# Altium PCB usage_monitoring_unit.PcbDoc
Units mm, origin at the board's own origin, x right, y up, seen from the top; angles counter-clockwise.
Board outline 87.63 x 38.33 mm, 2 copper layers (Top Layer, Bottom Layer); 52 components, 37 nets, 215 pads, 53 vias.
Unrouted connection lines stored in the file: 3.
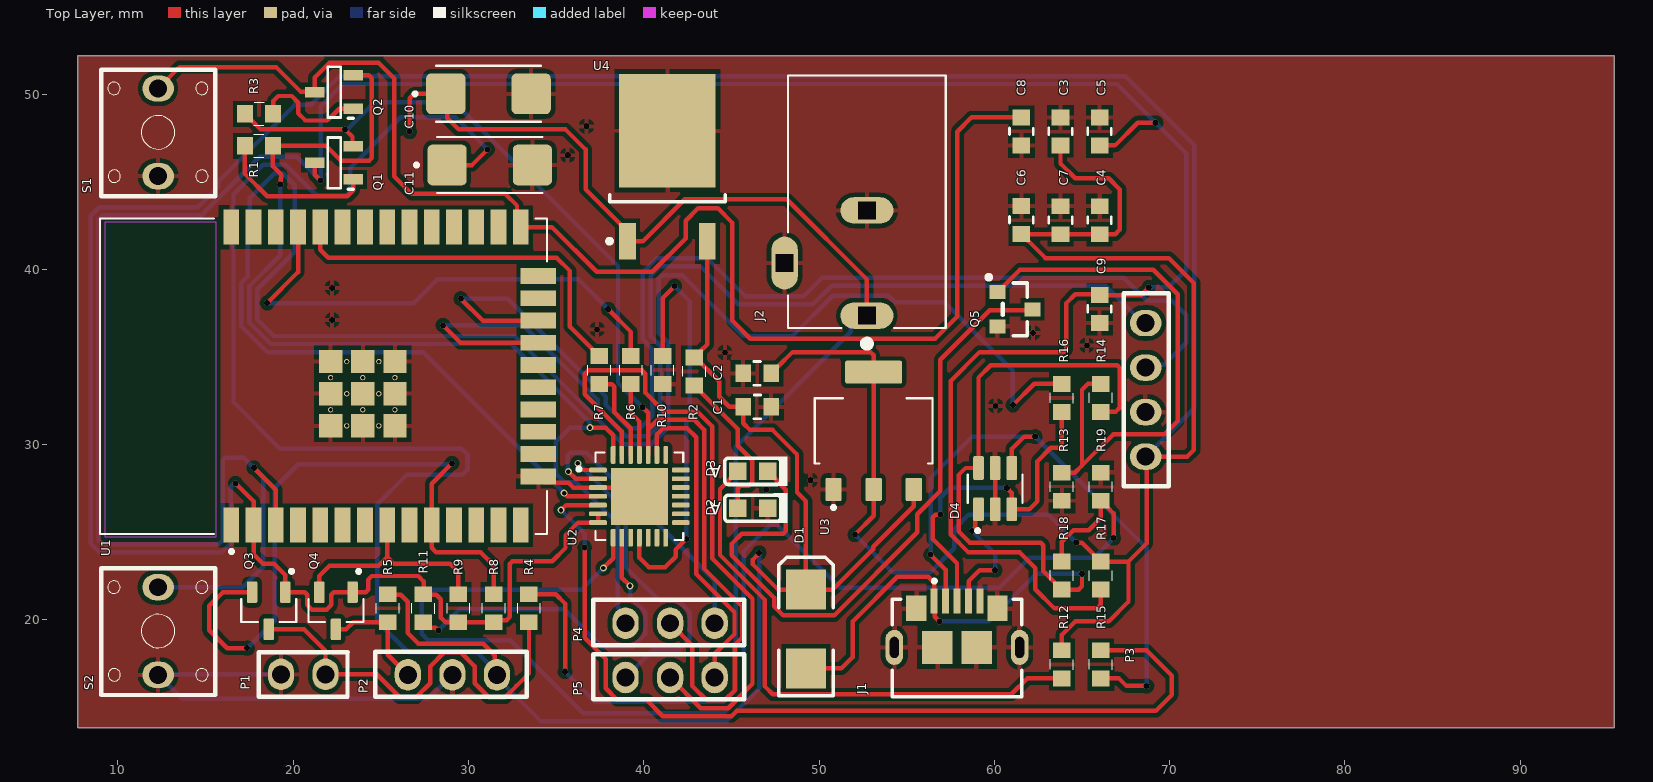
[diagram p0: Top Layer view]
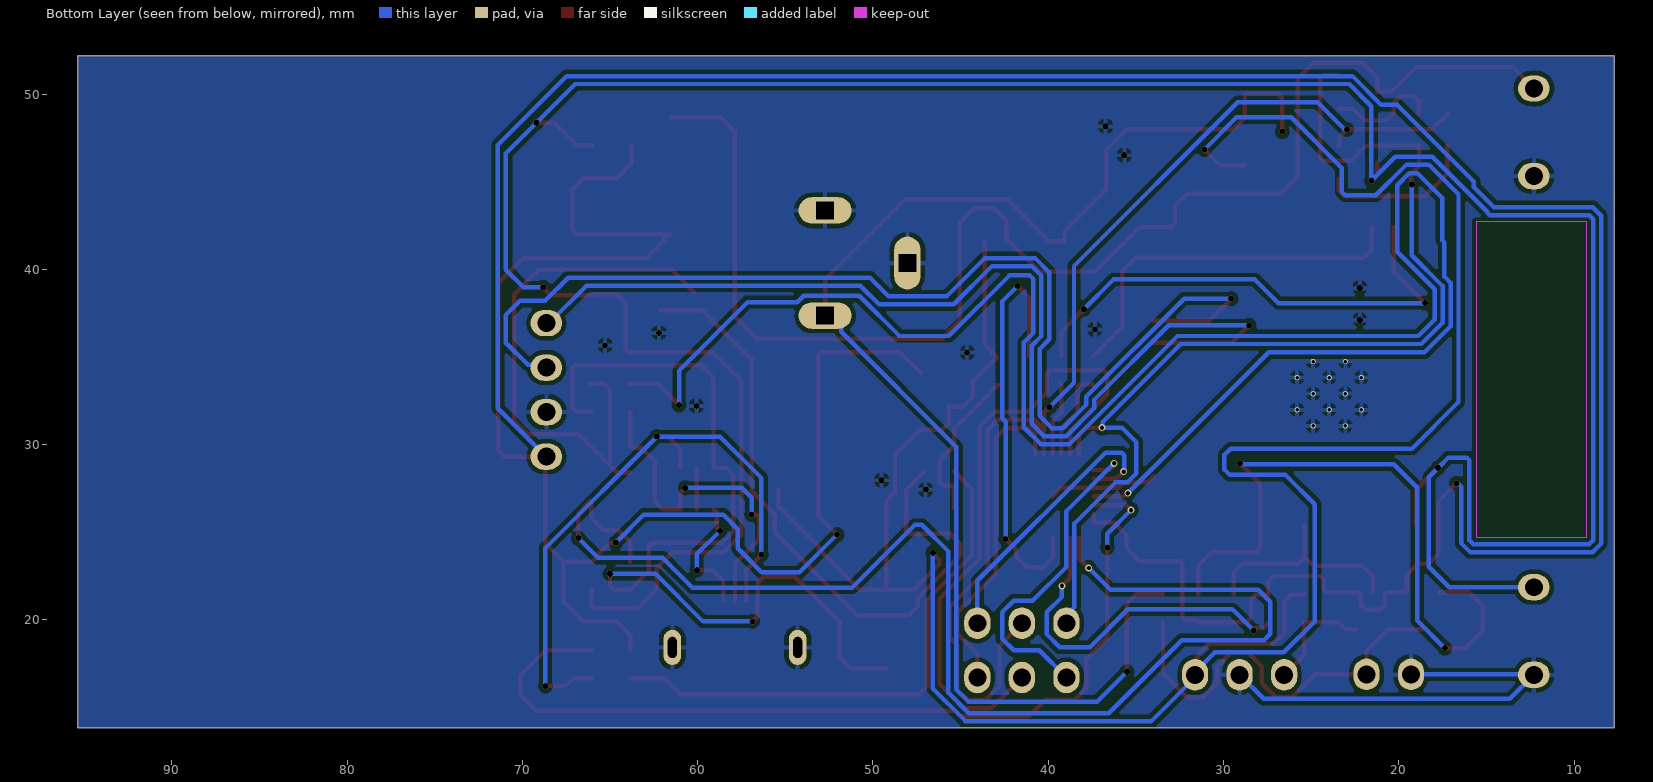
[diagram p1: Bottom Layer view, seen from below]

## Layer stack, top to bottom
Top Solder: solder mask 0.0102, Solder Resist, Dk 3.5
Top Layer: signal copper 0.0356
Dielectric 1: dielectric 0.32, FR-4, Dk 4.8
Bottom Layer: signal copper 0.0356
Bottom Solder: solder mask 0.0102, Solder Resist, Dk 3.5

## Board outline
95.352,13.843 95.352,52.172 7.722,52.172 7.722,13.843

## Design rules (kind name [scope] priority, off if disabled: settings)
Clearance [All] p1: gap=0.254 ignorepadtopadclearanceinfootprint=TRUE except(0: Arc-Hole Track-Hole SMDPad-Hole THPad-Hole Via-Hole Fill-Hole Poly-Hole Region-Hole Text-Hole; 0.2: Arc-Arc Arc-Track Arc-SMDPad Track-Track Track-SMDPad)
PolygonConnect [All] p1: connectstyle=Relief reliefconductorwidth=0.254 reliefentries=4 polygonreliefangle="90 Angle" airgapwidth=0.254
RoutingVias [All] p1: holewidth=0.711 width=1.27 viastyle="Through Hole" minholewidth=0.711 minwidth=1.27 maxholewidth=0.711 maxwidth=1.27
SolderMaskExpansion [All] p1: expansion=0.102 istentingtop=FALSE
Width [All] p1: maxlimit=0.254 minlimit=0.254 preferedwidth=0.254
30 further rules are at their usual default settings.

## Components (designator, comment, footprint, x,y, rotation, side; value= is the part's Value field where it differs from the comment)
C1 "22uF" "CAPACITOR SMD" 45.669,32.157 r0 top
C2 "22uF" "CAPACITOR SMD" 47.269,34.062 r180 top
C3 "22uF" "CAPACITOR SMD" 63.773,47.066 r90 top
C4 "0.1uF" "CAPACITOR SMD" 66.002,41.999 r90 top
C5 "0.1uF" "CAPACITOR SMD" 66.002,47.066 r90 top
C6 "4.7uF" "CAPACITOR SMD" 61.544,42.012 r90 top
C7 "0.1uF" "CAPACITOR SMD" 63.773,41.999 r90 top
C8 "0.1uF" "CAPACITOR SMD" 61.544,47.066 r90 top
C9 "0.1uF" "CAPACITOR SMD" 66.002,36.932 r90 top
C10 "220uF" TAJC226K025RNJ 31.14,50.013 r0 top
C11 "220uF" TAJC226K025RNJ 31.213,45.949 r0 top
D1 "D Schottky" SMB 49.251,19.482 r90 top
D2 "GREEN" "LED SMD" 45.364,26.365 r180 top
D3 "YELLOW" "LED SMD" 45.364,28.473 r180 top
D4 "ESDA6V1BC6" ESDA6V1BC6 59.096,26.314 r90 top
J1 "USB B MICRO" USB3076-XX-X_REVC 56.569,21.078 r0 top
J2 "PJ-102A DC JACK" PJ-102A 52.73,43.358 r90 top
P1 "2x1" "MALE HEADER 2x1" 19.304,16.891 r90 top
P2 "3X1" "MALE HEADER 3X1" 31.623,16.866 r270 top
P3 "OLED DISPLAY" "OLED DISPLAY" 68.631,29.312 r180 top
P4 "3X1" "FEMALE HEADER 3X1" 44.044,19.812 r270 top
P5 "3X1" "FEMALE HEADER 3X1" 44.044,16.713 r270 top
Q1 "SS8050-G" SS8050-G 22.327,46.076 r180 top
Q2 "SS8050-G" SS8050-G 22.327,50.114 r180 top
Q3 "N CHANNEL FIELD EFFECT TRANSISTOR" BSS-138 19.553,21.582 r270 top
Q4 "N CHANNEL FIELD EFFECT TRANSISTOR" BSS-138 23.388,21.582 r270 top
Q5 "ID" "NPN SOT-23" 60.179,38.699 r270 top
R1 "10K" "RESISTOR SMD" 18.847,47.041 r180 top
R2 "2K" "RESISTOR SMD" 42.878,34.976 r270 top
R3 "10K" "RESISTOR SMD" 17.247,48.87 r0 top
R4 "10K" "RESISTOR SMD" 33.452,19.863 r90 top
R5 "10K" "RESISTOR SMD" 25.4,19.863 r90 top
R6 "0R" "RESISTOR SMD" 39.27,35.052 r270 top
R7 "0R" "RESISTOR SMD" 37.465,35.052 r270 top
R8 "10K" "RESISTOR SMD" 31.439,19.863 r90 top
R9 "10K" "RESISTOR SMD" 29.426,19.863 r90 top
R10 "10K" "RESISTOR SMD" 41.074,35.052 r270 top
R11 "2K" "RESISTOR SMD" 27.413,21.463 r270 top
R12 "330" "RESISTOR SMD" 63.848,18.262 r270 top
R13 "22K" "RESISTOR SMD" 63.848,28.397 r270 top
R14 "47K" "RESISTOR SMD" 66.077,31.864 r90 top
R15 "22" "RESISTOR SMD" 66.077,18.262 r270 top
R16 "22" "RESISTOR SMD" 63.848,33.464 r270 top
R17 "10K" "RESISTOR SMD" 66.077,23.33 r270 top
R18 "22.1K" "RESISTOR SMD" 63.848,21.73 r90 top
R19 "47.5K" "RESISTOR SMD" 66.077,28.397 r270 top
S1 "SW-PB" "PUSH BUTTON 2PIN" 12.294,50.314 r0 top
S2 "SW-PB" "PUSH BUTTON 2PIN" 12.294,21.866 r0 top
U1 "ESP32 WROOM 32D" "ESP32 WROOM 32D 4MB" 16.47,25.403 r90 top
U2 "CP2102N-A01-GQFN28" CP2102N-A01-GQFN28 39.751,27.051 r0 top
U3 "AMS1117-3.3" AMS1117-3.3 53.111,30.785 r0 top
U4 "L78M05ACDT-TR" L78M05ACDT-TR 39.071,41.604 r90 top

## Footprints (in the part's own frame and the unit in brackets; to place one, negate y for a bottom-side part, rotate by r counter-clockwise, add the part's x,y. Pads: shape width x height; smd on the part's side, far side on the other; paste and mask are expansions set on the pad)
AMS1117-3.3 [mm]
  rrect15% 0.93x1.31 smd: 1(-2.29,-3.345) 2(0,-3.345) 3(2.29,-3.345)
  rrect15% 3.24x1.31 smd: 4(0,3.345)
  silkscreen extent -3.36,-4.47 3.36,1.86, body extent -3.25,-3.63 3.25,3.37, height 1.77
BSS-138 [mm]
  rrect25% 1.23x0.6 smd: 1(0,0) 2(0,-1.9) 3(2.12,-0.95)
  silkscreen extent -1.29,-2.52 1.71,0.62, body extent -0.09,-2.4 2.21,0.5, height 1.1
"CAPACITOR SMD" [mm]
  rect 0.9x1 smd: 1(0,0) 2(1.6,0)
  silkscreen extent 0.61,-0.68 1,0.67, body extent -0.08,-0.48 1.68,0.47, height 1
CP2102N-A01-GQFN28 [mm]
  rrect50% 1.01x0.27 smd: 1(-2.36,1.5) 2(-2.36,1) 3(-2.36,0.5) 4(-2.36,0) 5(-2.36,-0.5) 6(-2.36,-1) 7(-2.36,-1.5) 15(2.36,-1.5) 16(2.36,-1) 17(2.36,-0.5) 18(2.36,0) 19(2.36,0.5) 20(2.36,1) 21(2.36,1.5)
  rrect50% 0.27x1.01 smd: 8(-1.5,-2.36) 9(-1,-2.36) 10(-0.5,-2.36) 11(0,-2.36) 12(0.5,-2.36) 13(1,-2.36) 14(1.5,-2.36) 22(1.5,2.36) 23(1,2.36) 24(0.5,2.36) 25(0,2.36) 26(-0.5,2.36) 27(-1,2.36) 28(-1.5,2.36)
  rect 3.25x3.25 smd paste-3: 29(0,0)
  silkscreen extent -3.55,-2.5 2.5,2.5, body extent -2.5,-2.5 2.5,2.5, height 0.81
ESDA6V1BC6 [mm]
  rrect25% 1.36x0.6 smd: 1(0,0) 2(0,-0.95) 3(0,-1.9) 4(2.35,-1.9) 5(2.35,-0.95) 6(2.35,0)
  silkscreen extent -1.32,-2.51 1.99,0.61, body extent -0.22,-2.41 2.58,0.51, height 1.4
"ESP32 WROOM 32D 4MB" [mm] "RX TXRX MOD WIFI TRACE ANT SMD"
  rect 2x0.9 smd: 1(0,0) 2(0,-1.27) 3(0,-2.54) 4(0,-3.81) 5(0,-5.08) 6(0,-6.35) 7(0,-7.62) 8(0,-8.89) 9(0,-10.16) 10(0,-11.43) 11(0,-12.7) 12(0,-13.97) 13(0,-15.24) 14(0,-16.51) 25(17,-16.51) 26(17,-15.24) 27(17,-13.97) 28(17,-12.7) 29(17,-11.43) 30(17,-10.16) 31(17,-8.89) 32(17,-7.62) 33(17,-6.35) 34(17,-5.08) 35(17,-3.81) 36(17,-2.54) 37(17,-1.27) 38(17,0)
  rect 0.9x2 smd: 15(2.785,-17.51) 16(4.055,-17.51) 17(5.325,-17.51) 18(6.595,-17.51) 19(7.865,-17.51) 20(9.135,-17.51) 21(10.405,-17.51) 22(11.675,-17.51) 23(12.945,-17.51) 24(14.215,-17.51)
  rect 1.33x1.33 smd: 39_1(5.665,-5.665) 39_2(7.5,-5.665) 39_3(9.335,-5.665) 39_4(5.665,-7.5) 39_5(7.5,-7.5) 39_6(9.335,-7.5) 39_7(5.665,-9.335) 39_8(7.5,-9.335) 39_9(9.335,-9.335)
  round 0.3 hole 0.2: 39_10(6.583,-5.665) 39_11(8.418,-5.665) 39_12(5.665,-6.582) 39_13(7.5,-6.582) 39_14(9.335,-6.582) 39_15(6.583,-7.5) 39_16(8.418,-7.5) 39_17(5.665,-8.417) 39_18(7.5,-8.417) 39_19(9.335,-8.417) 39_20(6.583,-9.335) 39_21(8.418,-9.335)
  Keep-Out Layer region: 17.303,0.879 -0.697,0.879 -0.697,7.179 17.303,7.179
  Keep-Out Layer region: 17.303,0.879 -0.697,0.879 -0.697,7.179 17.303,7.179
  silkscreen extent -1.6,-18.01 17.5,7.49, body extent -0.48,-18.22 17.52,7.28, height 3.26
"FEMALE HEADER 3X1" [mm]
  oval 1.8x1.5 hole 1.02: 1(0,0) 2(0,-2.54) 3(0,-5.08)
  silkscreen extent -1.33,-6.93 1.25,1.69, body extent -1.27,-6.35 1.27,1.27, height 8.5
L78M05ACDT-TR [mm]
  rect 2.1x0.95 smd: 1(0,0) 3(0,-4.56)
  rect 6.5x5.5 smd: 2(6.3,-2.28)
  silkscreen extent -0.12,-5.58 2.65,1.15, body extent -0.52,-5.55 9.18,0.95, height 2.32
"LED SMD" [mm]
  rect 1x1 smd paste+0 mask+0: 1(0,0) 2(-1.7,0)
  silkscreen extent -2.83,-0.86 0.75,0.84, body extent -1.65,-0.4 -0.05,0.4, height 0.25
"MALE HEADER 2x1" [mm] "2.54 mm"
  oval 1.8x1.5 hole 1.02: 1(0,0) 2(0,-2.54)
  silkscreen extent -1.28,-3.82 1.28,1.28, body extent -1.27,-3.81 1.27,1.27, height 8.89
"MALE HEADER 3X1" [mm]
  oval 1.8x1.5 hole 1.02: 1(0,0) 2(0,-2.54) 3(0,-5.08)
  silkscreen extent -1.33,-6.93 1.25,1.69, body extent -1.3,-6.35 1.24,1.27, height 9.5
"NPN SOT-23" [mm] "TRANSISTOR"
  rect 0.8x0.9 smd: 1(0,0) 2(1.96,0) 3(0.98,2)
  silkscreen extent -0.97,-0.62 2.48,1.7, body extent -0.54,0.3 2.5,1.7, height 1.11
"OLED DISPLAY" [mm]
  oval 1.8x1.5 hole 1.02: 1(0,0) 2(0,-2.54) 3(0,-5.08) 4(0,-7.62)
  silkscreen extent -1.33,-9.31 1.25,1.69, body extent -26.65,-17.73 1.35,10.27, height 5.16
PJ-102A [mm]
  oval 1.508x3.016 hole 1 square: 1(-6,0) 2(0,0)
  oval 3.016x1.508 hole 1 square: 3(-3,4.7)
  silkscreen extent -7.8,-4.5 7.7,4.5, body extent -6.7,-4.5 7.7,4.9, height 11.01
"PUSH BUTTON 2PIN" [mm] "5mm"
  oval 1.8x1.5 hole 1.02: 1(0,0) 2(0,-5)
  silkscreen extent -3.25,-6.15 3.25,1.07, body extent -3.1,-5.6 3.1,0.6, height 4.8
"RESISTOR SMD" [mm]
  rect 0.9x1 smd: 1(0,0) 2(1.6,0)
  silkscreen extent 0.51,-0.65 1.1,0.65, body extent -0.05,-0.47 1.65,0.47, height 0.6
SMB [mm] "DO-214-AA/SMB; 2 C-Bend Leads; Body 5.3 x 3.6 mm, inc. leads (LxW)"
  rect 2.3x2.3 smd: 1(-2.25,0) 2(2.25,0)
  silkscreen extent -3.8,-1.55 4.1,1.55, body extent -2.55,-1.25 2.55,1.25, height 2.41
SS8050-G [mm]
  rect 1.1x0.6 smd: 1(-1.1,0.95) 2(-1.1,-0.95) 3(1.1,0)
  silkscreen extent -1.09,-1.45 0.36,1.5, body extent -1.28,-1.49 1.12,1.41, height 1
TAJC226K025RNJ [mm]
  rrect25% 2.24x2.32 smd: 1(-2.435,0) 2(2.435,0)
  silkscreen extent -4.28,-1.6 3,1.6, body extent -3.1,-1.73 3.1,1.68, height 2.85
USB3076-XX-X_REVC [mm] "USB INTERFACE"
  rect 0.4x1.4 smd: 1(0,0) 2(0.65,0) 3(1.3,0) 4(1.96,0) 5(2.6,0)
  rrect100% 1x2 hole 1.2 slot 0.5 at 0 deg: 6(-2.275,-2.65) 7(4.875,-2.65)
  rect 1.15x1.45 smd: 8(-1.02,-0.42) 9(3.62,-0.42)
  rect 1.75x1.9 smd: 10(0.175,-2.65) 11(2.425,-2.65)
  silkscreen extent -2.4,-5.45 5,1.24, body extent -2.4,-5.45 5,0.1, height 2.66

## Part data
C1 C2 C3 C4 C5 C6 C7 C8 C9: library part "CAPACITOR SMD", "CAPACITOR"
C10 C11: library part TAJC226K025RNJ, "Tantalum Capacitors"
D1: "Schottky Diode", Code_JEDEC=DO-214-AA, LatestRevisionDate=17-Jul-2002, LatestRevisionNote="Re-released for DXP Platform.", PackageDescription="DO-214-AA/SMB; 2 C-Bend Leads; Body 5.3 x 3.6 mm, inc. leads (LxW)", PackageReference=SMB, Published=8-Jun-2000, Publisher="Altium Limited"
D2 D3: library part LED, "SMD COMPONENT, Typical RED, GREEN, YELLOW, AMBER GaAs LED"
D4: "ESD PROTECTION"
J1: library part USB3076-XX-X_REVC, "USB INTERFACE"
J2: "2.0 x 6.5 mm, 2.5 A, Horizontal, Through Hole, Tapered Pins, Dc Power Jack Connector"
P1: library part "HEADER 2X1", "2.54 mm Male/Female Header"
P2 P4 P5: library part "HEADER 3X1", "2.54 mm Male/Female Header"
P3: "0.96\" OLED display 4 pin"
Q1 Q2: "Bipolar (BJT) Transistor NPN 25 V 1.5 A 100MHz 300 mW Surface Mount SOT-23-3"
Q3 Q4: library part BSS-138, "MOSFET"
Q5: library part "NPN TRANSISTOR", "NPN Bipolar Transistor"
R1 R2 R3 R4 R5 R6 R7 R8 R9 R10 R11 R12 R13 R14 R15 R16 R17 R18 R19: library part "RESISTOR SMD", "Resistor,12K1,0603,1%,VISHAY"
S1 S2: library part "PUSH BUTTON 2PIN", "2 PIN- 5 mm"
U1: "39 PIN RX TXRX MOD WIFI TRACE ANT SMD"
U2: "USB BRIDGE, USB to UART USB 2.0 UART INTERFACE 28-QFN"
U3: "VOLTAGE REGULATOR INPUT-5V;OUTPUT-3V3"
U4: "Linear Voltage Regulator IC Positive Fixed 1 Output 500mA DPAK"

## Via types
v1: diameter 0.35, hole 0.35, Top Layer to Bottom Layer, 46 vias
v2: diameter 0.4, hole 0.25, Top Layer to Bottom Layer, 7 vias

## Nets (pads, with @x,y where several pads share a name; then routed paths per layer and width w, separated by ;. In a path a pad name is that pad's centre, name@x,y a point inside that pad or via, vN(x,y) a via of type N, cw(c..) or ccw(c..) an arc to the next point about the centre after c; other vN are vias at no path point)
5v: C1.1 C11.1 D1.2 P2.1 R2.1 R5.2 U3.3 U4.3 | length 142.1
  Top Layer w0.254: R5.2 25.425,21.438 26.137,21.438 26.532,21.042 26.532,19.255 27.143,18.644 30.836,18.644 31.497,17.982 31.497,16.992 P2.1 ; C11.1 30.201,45.949 v1(31.09,46.838) ; U4.3 43.631,35.729 43.251,35.349 43.251,35.299 42.928,34.976 44.298,33.606 44.298,32.741 44.881,32.157 C1.1 45.669,31.226 46.06,30.836 47.346,30.836 48.743,29.439 48.743,27.28 49.251,26.772 D1.2 ; v1(46.583,23.826) 46.583,23.8 46.228,23.445 46.228,23.165 47.661,21.732 D1.2 ; U3.3 55.401,26.478 53.091,24.168 53.091,24.042 50.782,21.732 D1.2
  Bottom Layer w0.254: v1(31.09,46.838) 29.261,48.666 26.137,48.666 23.266,45.796 23.266,44.425 23.063,44.221 21.311,44.221 19.558,45.974 18.288,45.974 16.596,44.282 16.596,32.426 19.253,29.769 29.591,29.769 29.947,29.413 29.947,28.575 29.642,28.27 26.467,28.27 24.79,26.594 24.79,19.914 26.557,18.147 30.492,18.147 31.623,17.016 31.623,16.716 34.112,14.227 44.721,14.227 46.583,16.089 v1(46.583,23.826)
12V: C10.1 J2.1 R4.2 U4.1 | length 80.5
  Top Layer w0.254: v1(26.645,47.854) 26.645,49.759 26.899,50.013 C10.1 28.799,49.919 28.799,48.62 29.439,47.981 35.535,47.981 36.678,46.838 36.678,44.573 39.071,42.179 U4.1 39.953,41.604 42.339,43.99 48.162,43.99 52.73,39.421 J2.1 ; R4.2 34.976,21.463 35.509,20.93 v1(35.509,17.043)
  Bottom Layer w0.254: v1(35.509,17.043) 37.211,15.342 44.552,15.342 45.241,16.031 45.241,29.868 51.805,36.432 51.805,36.779 52.384,37.358 J2.1
FLOW_DATA: P2.3 Q4.3 R5.1 | length 6.6
  Top Layer w0.254: Q4.3 23.018,19.462 23.419,19.863 R5.1 25.4,18.009 P2.3
FW_DT_CNV: Q4.2 R9.2 U1.8 | length 12.7
  Top Layer w0.254: Q4.2 21.488,22.504 22.073,23.089 24.867,23.089 25.36,23.582 ; U1.8 25.36,23.582 ; R9.2 29.426,22.721 28.931,23.216 25.727,23.216 25.36,23.582
GND: C1.2 C2.2 C3.2 C4.2 C5.2 C6.2 C7.2 C8.1 C9.1 C10.2 C11.2 D2.2 D4.2 D4.5 J1.5 J1.6 J1.7 J1.8 J1.9 J1.10 J1.11 J2.2 J2.3 P1.1 P2.2 P3.2 Q5.2 R10.2 R13.2 R19.1 S1.2 S2.2 U1.1 U1.15 U1.38 U1.39_1 U1.39_2 U1.39_3 U1.39_4 U1.39_5 U1.39_6 U1.39_7 U1.39_8 U1.39_9 U1.39_10 U1.39_11 U1.39_12 U1.39_13 U1.39_14 U1.39_15 U1.39_16 U1.39_17 U1.39_18 U1.39_19 U1.39_20 U1.39_21 U2.3 U2.29 U3.1 U4.2 | length 33.5
  Top Layer w0.254: U1.15 34.303,27.865 34.95,27.865 35.002,27.813 35.712,27.813 35.974,27.551 U2.3 39.251,27.551 U2.29 ; D4.2 D4.5
  Bottom Layer w0.254: P1.1 12.319,16.891 S2.2 13.665,15.494 27.711,15.494 P2.2
  other v1: 46.99,27.432 49.505,27.965 60.071,32.207 44.628,35.255 65.278,35.662 62.205,36.373 37.338,36.576 22.225,37.109 22.225,38.938 35.662,46.507 36.728,48.158
NetC2_1: C2.1 C3.1 C4.1 C6.1 C7.1 P3.1 Q3.1 Q4.1 R8.1 R9.1 R11.1 R12.1 R17.1 U1.2 U2.6 U2.7 U3.2 U3.4 | length 240.1
  Top Layer w0.254: v1(16.713,27.788) 17.74,26.761 U1.2 17.74,23.738 18.263,23.216 18.898,23.216 19.553,22.56 Q3.1 20.659,21.582 20.807,21.433 20.807,20.853 21.075,20.586 21.902,20.586 22.169,20.853 22.169,21.433 22.318,21.582 Q4.1 24.134,21.582 24.282,21.731 24.282,22.301 24.486,22.504 27.127,22.504 27.438,22.193 27.438,21.438 28.169,21.438 28.423,21.184 28.423,20.131 28.691,19.863 R9.1 R8.1 31.555,19.979 32.171,19.979 32.36,20.168 32.36,23.194 32.508,23.343 34.773,23.343 35.535,24.105 35.535,24.838 36.247,25.551 U2.7 U2.6@37.391,26.035 ; C2.1 47.269,34.112 47.592,34.435 47.642,34.435 48.488,35.281 52.934,35.281 53.111,35.103 U3.4 U3.2 53.111,25.933 v1(52.045,24.867) ; C6.1 C6.1@61.594,42.012 ; C3.1 63.773,46.031 64.618,45.187 66.523,45.187 67.158,44.552 67.158,42.266 66.891,41.999 C4.1 C7.1 63.76,42.012 C6.1@61.594,42.012 ; R12.1 63.848,19.144 64.618,19.914 66.523,19.914 67.653,21.044 67.653,23.33 ; v1(64.668,24.409) 64.997,24.409 65.704,23.703 65.704,23.653 66.027,23.33 R17.1 67.653,23.33 ; C6.1@61.594,42.012 61.917,41.689 61.917,41.639 62.916,40.64 69.952,40.64 71.374,39.218 71.374,29.693 70.993,29.312 P3.1 68.682,29.261 68.682,24.359 67.653,23.33
  Bottom Layer w0.254: v1(16.713,27.788) 16.695,27.769 16.605,27.769 16.426,27.591 16.426,24.36 15.937,23.871 8.945,23.871 8.456,24.36 8.456,43.052 8.945,43.541 14.571,43.541 15.723,44.693 15.723,45.009 20.091,49.378 20.999,49.378 22.647,51.025 67.466,51.025 71.399,47.092 71.399,32.08 P3.1 ; v1(52.045,24.867) 54.204,22.708 56.337,22.708 57.709,24.079 57.709,25.171 58.547,26.01 63.068,26.01 v1(64.668,24.409)
NetD2_1: D2.1 R2.2 | length 9
  Top Layer w0.254: R2.2 42.928,33.376 43.251,33.053 43.251,33.003 45.364,30.889 45.364,29.936 46.191,29.109 46.191,27.838 46,27.646 45.513,27.646 45.364,27.498 D2.1
NetD3_1: D3.1 R12.2 | length 31.2
  Top Layer w0.254: D3.1 44.348,27.457 44.348,23.705 46.914,21.14 46.914,16.205 47.364,15.755 60.967,15.755 61.874,16.662 R12.2
NetD3_2: D3.2 Q5.3 | length 39
  Top Layer w0.254: D3.2 48.108,27.43 48.108,25.066 47.959,24.917 45.593,24.917 45.009,24.333 45.009,23.687 47.444,21.252 47.444,20.776 47.965,20.255 50.862,20.255 55.601,24.994 55.601,26.035 56.921,27.356 56.921,34.849 59.741,37.668 62.128,37.668 Q5.3
NetD4_1: D4.1 J1.4 | length 7.1
  Top Layer w0.254: J1.4 58.529,22.207 59.157,22.835 v1(60.046,22.835) ; v1(58.728,25.073) 58.728,25.099 58.923,25.294 58.923,26.141 D4.1
  Bottom Layer w0.254: v1(58.728,25.073) 60.046,23.755 v1(60.046,22.835)
NetD4_3: D4.3 J1.3 R16.2 | length 19.8
  Top Layer w0.254: v1(56.919,26.01) 56.638,26.01 56.49,25.861 56.49,24.613 57.869,23.234 J1.3 ; v1(60.706,27.534) 60.996,27.244 D4.3 62.001,26.314 62.459,26.772 62.459,29.058 63.221,29.82 63.699,29.82 63.848,29.968 R16.2
  Bottom Layer w0.254: v1(56.919,26.01) 56.919,26.972 57.48,27.534 v1(60.706,27.534)
NetD4_4: D4.4 J1.2 R15.2 | length 36.7
  Top Layer w0.254: v1(56.363,23.724) 57.219,22.868 J1.2 ; D4.4 60.996,29.754 61.697,30.455 v1(62.332,30.455) ; R15.2 67.107,16.662 67.539,16.231 v1(68.682,16.231)
  Bottom Layer w0.254: v1(56.363,23.724) 56.363,28.092 58.725,30.455 v1(62.332,30.455) 68.682,24.105 v1(68.682,16.231)
NetQ1_1: Q1.1 R1.2 | length 9.1
  Top Layer w0.254: R1.2 17.247,45.441 18.517,44.171 23.089,44.171 23.427,44.509 Q1.1
NetQ2_1: Q2.1 R3.2 | length 6.6
  Top Layer w0.254: R3.2 18.868,48.891 18.868,49.602 19.152,49.886 19.914,49.886 20.295,49.505 20.295,48.891 20.697,48.489 21.946,48.489 22.621,49.164 Q2.1
NetQ5_1: Q5.1 R13.1 R14.2 | length 32
  Top Layer w0.254: Q5.1 60.229,38.699 60.502,38.972 60.502,39.022 61.46,39.98 69.063,39.98 70.46,38.583 70.46,31.344 69.698,30.582 66.777,30.582 64.999,28.804 ; R13.1 64.592,28.397 64.999,28.804 ; R14.2 65.341,33.464 64.999,33.122 64.999,28.804
NetR6_2: R6.2 U2.25 | length 4.2
  Top Layer w0.254: R6.2 39.27,31.8 39.751,31.318 U2.25
NetR7_2: R7.2 U2.26 | length 5.2
  Top Layer w0.254: R7.2 38.18,33.452 38.329,33.303 38.329,31.852 39.251,30.929 U2.26
NetR10_1: R10.1 U2.11 | length 24.1
  Top Layer w0.254: U2.11 39.751,23.546 40.284,23.012 41.224,23.012 41.818,23.606 41.818,24.012 v1(42.43,24.625) ; R10.1 41.074,38.356 v1(41.758,39.04)
  Bottom Layer w0.254: v1(41.758,39.04) 42.633,38.164 42.633,31.509 42.43,31.306 v1(42.43,24.625)
NetR11_2: R11.2 U2.9 | length 20.6
  Top Layer w0.254: R11.2 27.736,19.54 28.133,19.54 28.27,19.403 v1(28.296,19.403) ; U2.9 38.751,22.412 v2(39.218,21.946)
  Bottom Layer w0.254: v1(28.296,19.403) 29.492,20.599 35.458,20.599 37.617,18.44 39.341,18.44 40.095,19.194 40.095,20.43 39.218,21.307 v2(39.218,21.946)
OLED_SCL: P3.3 U1.22 | length 65.9
  Top Layer w0.254: v1(29.566,38.329) 30.816,37.078 U1.22
  Bottom Layer w0.254: v1(29.566,38.329) 32.247,38.329 37.84,32.736 37.84,32.264 39.167,30.937 39.786,30.937 40.485,31.636 40.485,35.454 39.935,36.004 39.935,39.822 40.753,40.64 43.612,40.64 45.799,38.452 49.095,38.452 50.165,39.522 67.386,39.522 68.707,38.202 70.129,38.202 70.942,37.389 70.942,35.814 69.696,34.568 68.807,34.568 P3.3
OLED_SDA: P3.4 U1.21 | length 60.8
  Top Layer w0.254: v1(28.55,36.805) 29.546,35.808 U1.21
  Bottom Layer w0.254: v1(28.55,36.805) 33.129,36.805 37.386,32.548 37.386,32.076 38.979,30.483 40.24,30.483 40.939,31.182 40.939,35.642 40.389,36.192 40.389,39.634 40.941,40.186 43.202,40.186 45.39,37.998 49.65,37.998 50.72,39.068 66.344,39.068 68.481,36.932 P3.4
RX: R7.1 U1.34 | length 21.6
  Top Layer w0.254: U1.34 21.55,41.123 22.007,40.665 35.027,40.665 35.789,39.903 35.789,36.728 37.092,35.425 37.092,35.375 37.415,35.052 R7.1
TX: R6.1 U1.35 | length 29
  Top Layer w0.254: v1(18.514,38.075) 20.28,39.841 U1.35 ; v1(37.973,37.719) 39.27,36.422 R6.1
  Bottom Layer w0.254: v1(18.514,38.075) 26.873,38.075 28.219,39.421 36.271,39.421 v1(37.973,37.719)
U1_EN: C5.1 C9.2 Q1.3 R17.2 S2.1 U1.3 | length 168.8
  Top Layer w0.254: v1(17.755,28.677) 19.01,27.421 U1.3 ; Q1.3 21.227,45.398 v1(21.565,45.06) ; C5.1 66.878,47.066 68.174,48.362 v1(69.19,48.362) ; R17.2 66.077,20.865 65.866,20.654 63.435,20.654 62.335,21.754 62.335,22.958 61.443,23.851 58.522,23.851 57.506,24.867 57.506,33.63 59.157,35.281 63.961,35.281 64.11,35.429 64.11,38.075 64.618,38.583 65.951,38.583 C9.2 68.377,38.532 v1(68.809,38.964)
  Bottom Layer w0.254: S2.1 17.116,21.866 18.288,23.038 18.288,28.143 v1(17.755,28.677) 17.17,29.261 16.121,29.261 15.972,29.112 15.972,24.548 15.749,24.325 9.133,24.325 8.91,24.548 8.91,42.864 9.133,43.087 14.812,43.087 14.961,43.236 14.961,43.289 18.1,46.428 20.196,46.428 v1(21.565,45.06) 21.565,49.301 22.835,50.571 66.98,50.571 v1(69.19,48.362) 70.945,46.606 70.945,39.983 69.926,38.964 v1(68.809,38.964)
U1_GPIO0: C8.2 Q2.3 S1.1 U1.25 | length 80.2
  Top Layer w0.254: S1.1 13.517,51.537 19.025,51.537 20.444,50.117 21.224,50.117 Q2.3 21.227,50.945 22.073,51.791 24.867,51.791 25.756,50.902 25.756,45.314 26.772,44.298 32.106,44.298 32.768,43.635 32.768,42.615 U1.25 34.762,42.403 37.313,39.853 40.488,39.853 42.393,41.758 42.393,42.774 43.113,43.494 44.212,43.494 45.06,42.647 45.06,37.059 46.076,36.043 56.617,36.043 57.887,37.313 57.887,47.854 58.699,48.666 C8.2
U2_CTS: P5.1 U2.23 | length 18.9
  Top Layer w0.254: U2.23 40.751,30.591 41.097,30.937 42.469,30.937 42.986,30.42 42.986,22.619 45.175,20.43 45.175,19.194 44.044,18.063 P5.1
U2_DCD: P5.3 U2.1 | length 19.2
  Top Layer w0.254: v2(36.243,28.931) 36.271,28.903 36.271,28.785 36.505,28.551 U2.1
  Bottom Layer w0.254: v2(36.243,28.931) 38.964,26.21 38.964,23.021 40.892,21.093 41.972,21.093 42.635,20.43 42.635,18.933 41.964,18.263 40.513,18.263 P5.3
U2_DSR: P5.2 U2.27 | length 36.4
  Top Layer w0.254: U2.27 38.751,30.753 36.638,32.867 36.638,34.037 36.829,34.229 39.905,34.229 40.097,34.037 40.097,32.954 41.177,31.874 43.063,31.874 43.894,31.043 43.894,23.517 46.203,21.209 46.203,16.351 44.816,14.964 43.253,14.964 P5.2
U2_DTR: P4.3 Q2.2 R1.1 U2.28 | length 62.1
  Top Layer w0.254: v1(19.262,44.841) 19.281,44.86 19.281,45.185 19.315,45.219 19.315,45.404 18.847,45.873 R1.1 21.869,47.041 22.708,46.203 24.337,46.203 24.486,46.351 24.486,50.902 24.323,51.064 Q2.2 ; v2(36.932,30.963) 37.821,30.963 38.251,30.532 U2.28
  Bottom Layer w0.254: v1(19.262,44.841) 19.262,40.809 17.504,39.05 17.504,36.947 18.713,35.738 32.44,35.738 36.904,31.274 36.904,30.991 v2(36.932,30.963) 35.789,30.963 34.976,30.15 34.976,28.353 35.488,27.842 36.166,27.842 38.506,25.502 38.506,20.734 38.964,20.277 P4.3
U2_RI: P4.1 U2.2 | length 16.7
  Top Layer w0.254: v2(35.695,28.456) 35.711,28.456 36.116,28.051 U2.2
  Bottom Layer w0.254: v2(35.695,28.456) 35.667,28.484 35.667,28.685 35.662,28.69 35.662,29.388 35.814,29.54 36.728,29.54 44.044,22.225 P4.1
U2_RTS: P4.2 Q1.2 R3.1 U2.24 | length 65.5
  Top Layer w0.254: R3.1 17.247,48.82 17.57,48.497 17.62,48.497 18.136,47.981 v1(22.962,47.981) 23.384,47.558 23.384,47.068 Q1.2 ; v1(39.929,32.131) 40.251,31.809 40.251,30.878 ; U2.24 40.251,30.878 ; P4.2 42.774,18.542 42.774,16.231 43.586,15.418 44.628,15.418 45.187,15.977 45.187,18.563 45.629,19.005 45.629,20.742 43.44,22.93 43.44,30.855 42.875,31.42 40.792,31.42 40.251,30.878
  Bottom Layer w0.254: v1(22.962,47.981) 22.98,47.999 23.107,47.999 24.638,49.53 29.184,49.53 38.529,40.185 38.529,33.531 v1(39.929,32.131)
U2_VBUS: R18.2 R19.2 U2.8 | length 75.5
  Top Layer w0.254: v2(37.694,22.962) 38.251,23.519 U2.8 ; R18.2 63.848,24.453 64.516,25.121 65.38,25.121 66.077,25.818 R19.2 66.127,26.797 66.45,26.474 66.45,26.424 66.802,26.072 v1(66.802,24.663)
  Bottom Layer w0.254: v2(37.694,22.962) 36.449,21.717 28.016,21.717 27.33,21.031 27.33,19.202 27.686,18.847 32.385,18.847 36.551,14.681 44.533,14.681 45.695,15.843 45.695,23.901 47.215,25.422 47.603,25.422 51.181,21.844 60.3,21.844 62.001,23.546 65.684,23.546 v1(66.802,24.663)
USB_DN: R15.1 U2.5 | length 52.7
  Top Layer w0.254: v2(35.281,26.264) 35.568,26.551 U2.5 ; v1(36.627,24.13) 36.627,18.974 37.833,17.768 37.833,16.095 38.495,15.432 40.168,15.432 41.091,14.51 45.004,14.51 45.302,14.808 69.215,14.808 70.129,15.723 70.129,16.815 68.682,18.262 R15.1
  Bottom Layer w0.254: v2(35.281,26.264) 36.627,24.917 v1(36.627,24.13)
USB_DP: R16.1 U2.4 | length 109
  Top Layer w0.254: v2(35.458,27.229) 35.636,27.051 U2.4 ; v1(61.062,32.258) 62.268,33.464 R16.1
  Bottom Layer w0.254: v2(35.458,27.229) 27.418,35.269 18.54,35.269 17.05,36.759 17.05,39.238 17.396,39.584 17.396,41.526 17.535,41.665 17.535,44.085 18.941,45.491 19.399,45.491 20.091,44.799 20.091,40.996 17.958,38.862 17.958,37.135 18.898,36.195 32.625,36.195 38.791,30.029 40.428,30.029 41.393,30.994 41.393,35.83 40.843,36.38 40.843,39.446 41.046,39.649 42.215,39.649 45.669,36.195 48.489,36.195 50.786,38.493 53.955,38.493 54.322,38.125 57.15,38.125 61.062,34.214 v1(61.062,32.258)
VBUS: D1.1 D4.6 J1.1 R14.1 R18.1 | length 54
  Top Layer w0.254: D1.1 51.268,17.232 51.918,17.882 51.918,19.914 54.458,22.454 56.236,22.454 56.569,22.121 J1.1 56.603,21.043 56.603,20.181 v1(56.871,19.914) ; v1(64.999,22.631) 64.999,21.92 64.808,21.73 R18.1 63.798,21.73 63.475,22.053 63.475,22.103 62.789,22.789 62.789,24.261 62.64,24.409 58.605,24.409 57.96,25.055 57.96,28.267 58.357,28.664 D4.6 59.096,33.823 59.792,34.519 67.009,34.519 67.158,34.37 67.158,32.106 66.916,31.864 R14.1
  Bottom Layer w0.254: v1(56.871,19.914) 59.69,19.914 62.408,22.631 v1(64.999,22.631)
VLV_SIGNAL: P1.2 Q3.3 R4.1 | length 24
  Top Layer w0.254: Q3.3 20.619,19.462 21.844,18.237 P1.2 24.769,16.891 26.075,15.585 27.011,15.585 27.813,16.387 27.813,17.345 28.615,18.147 29.551,18.147 30.353,17.345 30.353,16.387 31.155,15.585 32.091,15.585 32.737,16.231 32.741,16.231 33.452,16.942 R4.1
VLV_SN_CNV: Q3.2 R8.2 U1.10 | length 38.1
  Top Layer w0.254: v1(17.374,18.39) 16.231,18.39 15.215,19.406 15.215,20.803 15.994,21.582 Q3.2 ; v1(29.058,28.931) 27.9,27.773 U1.10 27.9,24.119 28.169,23.851 30.709,23.851 31.439,23.121 R8.2
  Bottom Layer w0.254: v1(17.374,18.39) 18.948,19.964 18.948,27.534 20.295,28.88 28.981,28.88 29.032,28.931 v1(29.058,28.931)
pads on no net: U1.4 U1.5 U1.6 U1.7 U1.9 U1.11 U1.12 U1.13 U1.14 U1.16 U1.17 U1.18 U1.19 U1.20 U1.23 U1.24 U1.26 U1.27 U1.28 U1.29 U1.30 U1.31 U1.32 U1.33 U1.36 U1.37 U2.10 U2.12 U2.13 U2.14 U2.15 U2.16 U2.17 U2.18 U2.19 U2.20 U2.21 U2.22

## Polygon pours and split planes (outlines as drawn)
GND on Top Layer "Top Layer-GND" (solid, pour order 0): 95.352,13.843 95.352,52.172 7.722,52.172 7.722,13.843
GND on Bottom Layer "Bottom Layer-GND" (solid, pour order 1): 95.352,13.843 95.352,52.172 7.722,52.172 7.722,13.843

## Text inside footprints (layer, text, board x,y; h text height)
D2: Top Overlay "A" at 44.414,26.714 h0.7 r180
D3: Top Overlay "A" at 44.414,28.822 h0.7 r180
U1: Mechanical 13 "ANTENNA" at 12.73,27.903 h1.78 r90